# EAGLE board CT_schematic (EAGLE 7.6.0)

Size 100 x 80 mm. Coordinates in mm from the lower left corner, seen from the top.
Outline: 0,0 100,0 100,80 0,80 0,0
Copper layers (1*16): Top 0.035mm / dielectric 1.5mm / Bottom 0.035mm
Design rules "default": minimum track width 10mil, minimum drill 24mil, track to track 8mil, track to pad 8mil, pad to pad 8mil, via to via 8mil, smd to smd 8mil, copper to edge 40mil, drill to drill 8mil, minimum pad ring 10mil, minimum via ring 8mil, stop-mask expansion 4mil, vias tented up to drill 0mil, thermal gap 10mil

## Footprints (pad centres in the part's own frame; a part is rotated, then mirrored left to right if it is on the bottom)
C0603 = smd 0.8 x 0.8: 1 -0.762,0; 2 0.762,0
C0402 = smd 0.5 x 0.5: 1 -0.508,0; 2 0.508,0
C0805 = smd 1.2 x 1.3: 1 -1.016,0; 2 1.016,0
C1210 = smd 1.2 x 2.5: 1 -1.524,0; 2 1.524,0
R0603 = smd 0.8 x 0.8: 1 -0.762,0; 2 0.762,0
EXV-9H = smd 3.505 x 1.676: 1 -2.857,0; 2 2.857,0
L0603 = smd 0.8 x 0.8: 1 -0.762,0; 2 0.762,0
L1210 = smd 1.2 x 2.5: 1 -1.524,0; 2 1.524,0
WE-HCI_7030/7040/7050 = smd 2.5 x 3: 1 -2.45,0; 2 2.45,0
PJ-037B_PACKAGE = drill 3.7 square: 1 12,0 | drill 3.2 square: 2 6,0
TFBGA216 = smd 0.4 x 0.4: A1 -5.6,5.6; A2 -4.8,5.6; A3 -4,5.6; A4 -3.2,5.6; A5 -2.4,5.6; A6 -1.6,5.6; A7 -0.8,5.6; A8 0,5.6; A9 0.8,5.6; A10 1.6,5.6; A11 2.4,5.6; A12 3.2,5.6; A13 4,5.6; A14 4.8,5.6; A15 5.6,5.6; B1 -5.6,4.8; B2 -4.8,4.8; B3 -4,4.8; B4 -3.2,4.8; B5 -2.4,4.8; B6 -1.6,4.8; B7 -0.8,4.8; B8 0,4.8; B9 0.8,4.8; B10 1.6,4.8; B11 2.4,4.8; B12 3.2,4.8; B13 4,4.8; B14 4.8,4.8; B15 5.6,4.8; C1 -5.6,4; C2 -4.8,4; C3 -4,4; C4 -3.2,4; C5 -2.4,4; C6 -1.6,4; C7 -0.8,4; C8 0,4; C9 0.8,4; C10 1.6,4; C11 2.4,4; C12 3.2,4; C13 4,4; C14 4.8,4; C15 5.6,4; D1 -5.6,3.2; D2 -4.8,3.2; D3 -4,3.2; D4 -3.2,3.2; D5 -2.4,3.2; D6 -1.6,3.2; D7 -0.8,3.2; D8 0,3.2; D9 0.8,3.2; D10 1.6,3.2; D11 2.4,3.2; D12 3.2,3.2; D13 4,3.2; D14 4.8,3.2; D15 5.6,3.2; E1 -5.6,2.4; E2 -4.8,2.4; E3 -4,2.4; E4 -3.2,2.4; E5 -2.4,2.4; E6 -1.6,2.4; E7 -0.8,2.4; E8 0,2.4; E9 0.8,2.4; E10 1.6,2.4; E11 2.4,2.4; E12 3.2,2.4; E13 4,2.4; E14 4.8,2.4; E15 5.6,2.4; F1 -5.6,1.6; F2 -4.8,1.6; F3 -4,1.6; F4 -3.2,1.6; F5 -2.4,1.6; F6 -1.6,1.6; F7 -0.8,1.6; F8 0,1.6; F9 0.8,1.6; F10 1.6,1.6; F11 2.4,1.6; F12 3.2,1.6; F13 4,1.6; F14 4.8,1.6; F15 5.6,1.6; G1 -5.6,0.8; G2 -4.8,0.8; G3 -4,0.8; G4 -3.2,0.8; G5 -2.4,0.8; G6 -1.6,0.8; G10 1.6,0.8; G11 2.4,0.8; G12 3.2,0.8; G13 4,0.8; G14 4.8,0.8; G15 5.6,0.8; H1 -5.6,0; H2 -4.8,0; H3 -4,0; H4 -3.2,0; H5 -2.4,0; H6 -1.6,0; H10 1.6,0; H11 2.4,0; H12 3.2,0; H13 4,0; H14 4.8,0; H15 5.6,0; J1 -5.6,-0.8; J2 -4.8,-0.8; J3 -4,-0.8; J4 -3.2,-0.8; J5 -2.4,-0.8; J6 -1.6,-0.8; J10 1.6,-0.8; J11 2.4,-0.8; J12 3.2,-0.8; J13 4,-0.8; J14 4.8,-0.8; J15 5.6,-0.8; K1 -5.6,-1.6; K2 -4.8,-1.6; K3 -4,-1.6; K4 -3.2,-1.6; K5 -2.4,-1.6; K6 -1.6,-1.6; K7 -0.8,-1.6; K8 0,-1.6; K9 0.8,-1.6; K10 1.6,-1.6; K11 2.4,-1.6; K12 3.2,-1.6; K13 4,-1.6; K14 4.8,-1.6; K15 5.6,-1.6; L1 -5.6,-2.4; L2 -4.8,-2.4; L3 -4,-2.4; L4 -3.2,-2.4; L5 -2.4,-2.4; L6 -1.6,-2.4; L7 -0.8,-2.4; L8 0,-2.4; L9 0.8,-2.4; L10 1.6,-2.4; L11 2.4,-2.4; L12 3.2,-2.4; L13 4,-2.4; L14 4.8,-2.4; L15 5.6,-2.4; M1 -5.6,-3.2; M2 -4.8,-3.2; M3 -4,-3.2; M4 -3.2,-3.2; M5 -2.4,-3.2; M6 -1.6,-3.2; M7 -0.8,-3.2; M8 0,-3.2; M9 0.8,-3.2; M10 1.6,-3.2; M11 2.4,-3.2; M12 3.2,-3.2; M13 4,-3.2; M14 4.8,-3.2; M15 5.6,-3.2; N1 -5.6,-4; N2 -4.8,-4; N3 -4,-4; N4 -3.2,-4; N5 -2.4,-4; N6 -1.6,-4; N7 -0.8,-4; N8 0,-4; N9 0.8,-4; N10 1.6,-4; N11 2.4,-4; N12 3.2,-4; N13 4,-4; N14 4.8,-4; N15 5.6,-4; P1 -5.6,-4.8; P2 -4.8,-4.8; P3 -4,-4.8; P4 -3.2,-4.8; P5 -2.4,-4.8; P6 -1.6,-4.8; P7 -0.8,-4.8; P8 0,-4.8; P9 0.8,-4.8; P10 1.6,-4.8; P11 2.4,-4.8; P12 3.2,-4.8; P13 4,-4.8; P14 4.8,-4.8; P15 5.6,-4.8; R1 -5.6,-5.6; R2 -4.8,-5.6; R3 -4,-5.6; R4 -3.2,-5.6; R5 -2.4,-5.6; R6 -1.6,-5.6; R7 -0.8,-5.6; R8 0,-5.6; R9 0.8,-5.6; R10 1.6,-5.6; R11 2.4,-5.6; R12 3.2,-5.6; R13 4,-5.6; R14 4.8,-5.6; R15 5.6,-5.6
ARDUCAM = drill 1 pad 1.8 square: 1 0,0 | drill 1 pad 1.8: 2 0,2.54; 3 2.54,0; 4 2.54,2.54; 5 5.08,0; 6 5.08,2.54; 7 7.62,0; 8 7.62,2.54; 9 10.16,0; 10 10.16,2.54; 11 12.7,0; 12 12.7,2.54; 13 15.24,0; 14 15.24,2.54; 15 17.78,0; 16 17.78,2.54; 17 20.32,0; 18 20.32,2.54; 19 22.86,0; 20 22.86,2.54
SSOP-20 = smd 1.651 x 0.432: 1 -3.48,2.925; 2 -3.48,2.275; 3 -3.48,1.625; 4 -3.48,0.975; 5 -3.48,0.325; 6 -3.48,-0.325; 7 -3.48,-0.975; 8 -3.48,-1.625; 9 -3.48,-2.275; 10 -3.48,-2.925; 11 3.48,-2.925; 12 3.48,-2.275; 13 3.48,-1.625; 14 3.48,-0.975; 15 3.48,-0.325; 16 3.48,0.325; 17 3.48,0.975; 18 3.48,1.625; 19 3.48,2.275; 20 3.48,2.925
HTSS-105-01-G-D = drill 1 pad 1.8 square: 1 0,0 | drill 1 pad 1.8: 2 0,2.54; 3 2.54,0; 4 2.54,2.54; 5 5.08,0; 6 5.08,2.54; 7 7.62,0; 8 7.62,2.54; 9 10.16,0; 10 10.16,2.54
LBGA-64 = smd 0.559 x 0.559: A1 -3.5,3.5; A2 -2.5,3.5; A3 -1.5,3.5; A4 -0.5,3.5; A5 0.5,3.5; A6 1.5,3.5; A7 2.5,3.5; A8 3.5,3.5; B1 -3.5,2.5; B2 -2.5,2.5; B3 -1.5,2.5; B4 -0.5,2.5; B5 0.5,2.5; B6 1.5,2.5; B7 2.5,2.5; B8 3.5,2.5; C1 -3.5,1.5; C2 -2.5,1.5; C3 -1.5,1.5; C4 -0.5,1.5; C5 0.5,1.5; C6 1.5,1.5; C7 2.5,1.5; C8 3.5,1.5; D1 -3.5,0.5; D2 -2.5,0.5; D3 -1.5,0.5; D4 -0.5,0.5; D5 0.5,0.5; D6 1.5,0.5; D7 2.5,0.5; D8 3.5,0.5; E1 -3.5,-0.5; E2 -2.5,-0.5; E3 -1.5,-0.5; E4 -0.5,-0.5; E5 0.5,-0.5; E6 1.5,-0.5; E7 2.5,-0.5; E8 3.5,-0.5; F1 -3.5,-1.5; F2 -2.5,-1.5; F3 -1.5,-1.5; F4 -0.5,-1.5; F5 0.5,-1.5; F6 1.5,-1.5; F7 2.5,-1.5; F8 3.5,-1.5; G1 -3.5,-2.5; G2 -2.5,-2.5; G3 -1.5,-2.5; G4 -0.5,-2.5; G5 0.5,-2.5; G6 1.5,-2.5; G7 2.5,-2.5; G8 3.5,-2.5; H1 -3.5,-3.5; H2 -2.5,-3.5; H3 -1.5,-3.5; H4 -0.5,-3.5; H5 0.5,-3.5; H6 1.5,-3.5; H7 2.5,-3.5; H8 3.5,-3.5
TFBGA-153 = smd 0.3 x 0.3: A1 -3.25,3.25; A2 -2.75,3.25; A3 -2.25,3.25; A4 -1.75,3.25; A5 -1.25,3.25; A6 -0.75,3.25; A7 -0.25,3.25; A8 0.25,3.25; A9 0.75,3.25; A10 1.25,3.25; A11 1.75,3.25; A12 2.25,3.25; A13 2.75,3.25; A14 3.25,3.25; B1 -3.25,2.75; B2 -2.75,2.75; B3 -2.25,2.75; B4 -1.75,2.75; B5 -1.25,2.75; B6 -0.75,2.75; B7 -0.25,2.75; B8 0.25,2.75; B9 0.75,2.75; B10 1.25,2.75; B11 1.75,2.75; B12 2.25,2.75; B13 2.75,2.75; B14 3.25,2.75; C1 -3.25,2.25; C2 -2.75,2.25; C3 -2.25,2.25; C4 -1.75,2.25; C5 -1.25,2.25; C6 -0.75,2.25; C7 -0.25,2.25; C8 0.25,2.25; C9 0.75,2.25; C10 1.25,2.25; C11 1.75,2.25; C12 2.25,2.25; C13 2.75,2.25; C14 3.25,2.25; D1 -3.25,1.75; D2 -2.75,1.75; D3 -2.25,1.75; D4 -1.75,1.75; D12 2.25,1.75; D13 2.75,1.75; D14 3.25,1.75; E1 -3.25,1.25; E2 -2.75,1.25; E3 -2.25,1.25; E5 -1.25,1.25; E6 -0.75,1.25; E7 -0.25,1.25; E8 0.25,1.25; E9 0.75,1.25; E10 1.25,1.25; E12 2.25,1.25; E13 2.75,1.25; E14 3.25,1.25; F1 -3.25,0.75; F2 -2.75,0.75; F3 -2.25,0.75; F5 -1.25,0.75; F10 1.25,0.75; F12 2.25,0.75; F13 2.75,0.75; F14 3.25,0.75; G1 -3.25,0.25; G2 -2.75,0.25; G3 -2.25,0.25; G5 -1.25,0.25; G10 1.25,0.25; G12 2.25,0.25; G13 2.75,0.25; G14 3.25,0.25; H1 -3.25,-0.25; H2 -2.75,-0.25; H3 -2.25,-0.25; H5 -1.25,-0.25; H10 1.25,-0.25; H12 2.25,-0.25; H13 2.75,-0.25; H14 3.25,-0.25; J1 -3.25,-0.75; J2 -2.75,-0.75; J3 -2.25,-0.75; J5 -1.25,-0.75; J10 1.25,-0.75; J12 2.25,-0.75; J13 2.75,-0.75; J14 3.25,-0.75; K1 -3.25,-1.25; K2 -2.75,-1.25; K3 -2.25,-1.25; K5 -1.25,-1.25; K6 -0.75,-1.25; K7 -0.25,-1.25; K8 0.25,-1.25; K9 0.75,-1.25; K10 1.25,-1.25; K12 2.25,-1.25; K13 2.75,-1.25; K14 3.25,-1.25; L1 -3.25,-1.75; L2 -2.75,-1.75; L3 -2.25,-1.75; L12 2.25,-1.75; L13 2.75,-1.75; L14 3.25,-1.75; M1 -3.25,-2.25; M2 -2.75,-2.25; M3 -2.25,-2.25; M4 -1.75,-2.25; M5 -1.25,-2.25; M6 -0.75,-2.25; M7 -0.25,-2.25; M8 0.25,-2.25; M9 0.75,-2.25; M10 1.25,-2.25; M11 1.75,-2.25; M12 2.25,-2.25; M13 2.75,-2.25; M14 3.25,-2.25; N1 -3.25,-2.75; N2 -2.75,-2.75; N3 -2.25,-2.75; N4 -1.75,-2.75; N5 -1.25,-2.75; N6 -0.75,-2.75; N7 -0.25,-2.75; N8 0.25,-2.75; N9 0.75,-2.75; N10 1.25,-2.75; N11 1.75,-2.75; N12 2.25,-2.75; N13 2.75,-2.75; N14 3.25,-2.75; P1 -3.25,-3.25; P2 -2.75,-3.25; P3 -2.25,-3.25; P4 -1.75,-3.25; P5 -1.25,-3.25; P6 -0.75,-3.25; P7 -0.25,-3.25; P8 0.25,-3.25; P9 0.75,-3.25; P10 1.25,-3.25; P11 1.75,-3.25; P12 2.25,-3.25; P13 2.75,-3.25; P14 3.25,-3.25
ABS07-32.768KHZ-7-T = smd 1.1 x 2.4: 1 -2.5,0; 2 0,0
ASFL1 = smd 1.7 x 1.5: 1 -1.27,-1.1; 2 1.27,-1.1; 3 1.27,1.1; 4 -1.27,1.1
IDT74FCT38072 = smd 0.51 x 1: 1 0,0; 2 1.27,0; 3 2.54,0; 4 3.81,0; 5 3.81,4.95; 6 2.54,4.95; 7 1.27,4.95; 8 0,4.95
TSOT-23-5 = smd 1.3 x 0.62: 1 -1.31,0.95; 2 -1.31,0; 3 -1.31,-0.95; 4 1.31,-0.95; 5 1.31,0.95
HTSSOP14 = smd 1.676 x 0.356: 1 -2.8,1.95; 2 -2.8,1.3; 3 -2.8,0.65; 4 -2.8,0; 5 -2.8,-0.65; 6 -2.8,-1.3; 7 -2.8,-1.95; 8 2.8,-1.95; 9 2.8,-1.3; 10 2.8,-0.65; 11 2.8,0; 12 2.8,0.65; 13 2.8,1.3; 14 2.8,1.95 | smd 3 x 5: 15 0,0 | drill 0.4 pad 0.45: P$1 -0.75,1.5; P$2 0.75,1.5; P$3 -0.75,0; P$4 0.8,0; P$5 -0.75,-1.5; P$6 0.9,-1.5
QFN-38_UHF = smd 0.75 x 0.3: 1 -2.4,2.75; 2 -2.4,2.25; 3 -2.4,1.75; 4 -2.4,1.25; 6 -2.4,0.25; 7 -2.4,-0.25; 8 -2.4,-0.75; 9 -2.4,-1.25; 10 -2.4,-1.75; 11 -2.4,-2.25; 12 -2.4,-2.75; 20 2.4,-2.75; 21 2.4,-2.25; 22 2.4,-1.75; 23 2.4,-1.25; 24 2.4,-0.75; 25 2.4,-0.25; 26 2.4,0.25; 27 2.4,0.75; 28 2.4,1.25; 29 2.4,1.75; 30 2.4,2.25; 31 2.4,2.75 | smd 0.758 x 0.3: 5 -2.4,0.75 | smd 0.3 x 0.75: 13 -1.5,-3.4; 14 -1,-3.4; 15 -0.5,-3.4; 16 0,-3.4; 17 0.5,-3.4; 18 1,-3.4; 19 1.5,-3.4; 32 1.5,3.4; 33 1,3.4; 34 0.5,3.4; 35 0,3.4; 36 -0.5,3.4; 37 -1,3.4; 38 -1.5,3.4 | smd 3.2 x 5.2: 39 0,0
IRF8306MTRPBF = smd 0.9 x 1.85: 1 0,0; 2 0,-2.35; 6 6.4,0; 7 6.4,-2.35 | smd 0.75 x 0.75: 3 1.75,-1.175 | smd 1.45 x 0.87: 4 3.5,-0.565; 5 3.5,-1.785
SW_4-1437565-2 = smd 1.4 x 2.1: 1 -2.23,4.55; 2 -2.23,-4.55; 3 2.23,4.55; 4 2.23,-4.55
LGM67K-G1J2-24-Z = smd 0.8 x 1.4: A -2,0; C 0,0
NC7SZ125M5X = smd 1.3 x 0.7: 1 -1.3,0.95; 2 -1.3,0; 3 -1.3,-0.95; 4 1.3,-0.95; 5 1.3,0.95

## Placement (x,y rotation side)
C1  1e-06  [C0603]  -73.66,72.39 0 top  (outside the outline)
C2  1e-07  [C0603]  -77.47,72.39 0 top  (outside the outline)
C3  1e-07  [C0603]  -81.28,72.39 0 top  (outside the outline)
C4  1e-07  [C0603]  -85.09,72.39 0 top  (outside the outline)
C5  1e-07  [C0603]  -15.24,77.47 0 top  (outside the outline)
C6  1e-07  [C0603]  -19.05,77.47 0 top  (outside the outline)
C7  1e-07  [C0603]  -22.86,77.47 0 top  (outside the outline)
C8  1e-07  [C0603]  -26.67,77.47 0 top  (outside the outline)
C9  1e-07  [C0603]  -30.48,77.47 0 top  (outside the outline)
C10  1e-07  [C0603]  -34.29,77.47 0 top  (outside the outline)
C11  1e-07  [C0603]  -38.1,77.47 0 top  (outside the outline)
C12  1e-07  [C0603]  -41.91,77.47 0 top  (outside the outline)
C13  1e-07  [C0603]  -45.72,77.47 0 top  (outside the outline)
C14  1e-07  [C0603]  -49.53,77.47 0 top  (outside the outline)
C15  1e-07  [C0603]  -53.34,77.47 0 top  (outside the outline)
C16  1e-07  [C0603]  -57.15,77.47 0 top  (outside the outline)
C17  1e-07  [C0603]  -60.96,77.47 0 top  (outside the outline)
C18  1e-07  [C0603]  -64.77,77.47 0 top  (outside the outline)
C19  1e-07  [C0603]  -68.58,77.47 0 top  (outside the outline)
C20  1e-07  [C0603]  -72.39,77.47 0 top  (outside the outline)
C21  1e-07  [C0603]  -76.2,77.47 0 top  (outside the outline)
C22  4.7e-06  [C0603]  -54.61,72.39 0 top  (outside the outline)
C23  1e-08  [C0603]  -80.01,77.47 0 top  (outside the outline)
C24  1e-06  [C0603]  -83.82,77.47 0 top  (outside the outline)
C25  1e-07  [C0603]  -15.24,82.55 0 top  (outside the outline)
C26  1e-07  [C0603]  -19.05,82.55 0 top  (outside the outline)
C27  1e-07  [C0603]  -22.86,82.55 0 top  (outside the outline)
C28  1e-11  [C0402]  -73.66,82.55 0 top  (outside the outline)
C29  1e-11  [C0402]  -77.47,82.55 0 top  (outside the outline)
C30  1e-06  [C0603]  -26.67,82.55 0 top  (outside the outline)
C31  1e-06  [C0603]  -30.48,82.55 0 top  (outside the outline)
C32  1e-06  [C0603]  -34.29,82.55 0 top  (outside the outline)
C33  1e-06  [C0603]  -38.1,82.55 0 top  (outside the outline)
C34  4.7e-06  [C0805]  -85.09,49.53 0 top  (outside the outline)
C35  1e-08  [C0402]  -81.28,82.55 0 top  (outside the outline)
C36  1e-08  [C0402]  -85.09,82.55 0 top  (outside the outline)
C37  1e-07  [C0402]  -15.24,87.63 0 top  (outside the outline)
C38  2.2e-06  [C0603]  -58.42,72.39 0 top  (outside the outline)
C39  2.2e-06  [C0603]  -62.23,72.39 0 top  (outside the outline)
C40  1e-07  [C0402]  -19.05,87.63 0 top  (outside the outline)
C41  1e-07  [C0402]  -22.86,87.63 0 top  (outside the outline)
C42  2.2e-06  [C0603]  -66.04,72.39 0 top  (outside the outline)
C43  1e-08  [C0402]  -26.67,87.63 0 top  (outside the outline)
C44  1e-08  [C0402]  -30.48,87.63 0 top  (outside the outline)
C45  1e-05  [C0805]  -15.24,57.15 0 top  (outside the outline)
C46  1e-05  [C0805]  -20.32,57.15 0 top  (outside the outline)
C47  1e-06  [C0603]  -41.91,82.55 0 top  (outside the outline)
C48  3.3e-09  [C0402]  -69.85,82.55 0 top  (outside the outline)
C49  1e-07  [C0402]  -34.29,87.63 0 top  (outside the outline)
C50  2.2e-05  [C1210]  -29.21,50.8 0 top  (outside the outline)
C51  2.2e-05  [C1210]  -35.56,50.8 0 top  (outside the outline)
C52  1e-05  [C0805]  -25.4,57.15 0 top  (outside the outline)
C53  1e-05  [C0805]  -30.48,57.15 0 top  (outside the outline)
C54  1e-05  [C0805]  -35.56,57.15 0 top  (outside the outline)
C55  1e-05  [C0805]  -40.64,57.15 0 top  (outside the outline)
C56  1e-07  [C0402]  -38.1,87.63 0 top  (outside the outline)
C57  2.2e-06  [C0603]  -69.85,72.39 0 top  (outside the outline)
C58  2.45e-08  [R0603]  -52.07,62.23 0 top  (outside the outline)
C59  2.8258362168397e-09  [R0603]  -63.5,57.15 0 top  (outside the outline)
C60  7.105e-09  [R0603]  -31.75,62.23 0 top  (outside the outline)
C61  0.0001  [EXV-9H]  -72.39,34.29 0 top  (outside the outline)
C62  0.0001  [EXV-9H]  -17.78,43.18 0 top  (outside the outline)
C63  1e-08  [C0402]  -41.91,87.63 0 top  (outside the outline)
C64  1e-08  [C0402]  -45.72,87.63 0 top  (outside the outline)
C65  1e-08  [C0402]  -49.53,87.63 0 top  (outside the outline)
C66  1e-08  [C0402]  -53.34,87.63 0 top  (outside the outline)
F1  240.0  [L0603]  -45.72,82.55 0 top  (outside the outline)
I1  1.5e-05  [L1210]  -41.91,50.8 0 top  (outside the outline)
I2  1.5e-05  [L1210]  -48.26,50.8 0 top  (outside the outline)
I3  3.3e-06  [WE-HCI_7030/7040/7050]  -80.01,6.35 0 top  (outside the outline)
I4  1.5e-05  [L1210]  -54.61,50.8 0 top  (outside the outline)
J1  PJ-037B  [PJ-037B_PACKAGE]  -74.93,7.62 0 top  (outside the outline)
R2  1000.0  [R0603]  -49.53,82.55 0 top  (outside the outline)
R7  4700.0  [R0603]  -53.34,82.55 0 top  (outside the outline)
R8  4700.0  [R0603]  -57.15,82.55 0 top  (outside the outline)
R9  4700.0  [R0603]  -60.96,82.55 0 top  (outside the outline)
R10  4700.0  [R0603]  -64.77,82.55 0 top  (outside the outline)
R11  10000.0  [R0603]  -57.15,62.23 0 top  (outside the outline)
R12  10000.0  [R0603]  -62.23,62.23 0 top  (outside the outline)
R13  10000.0  [R0603]  -67.31,62.23 0 top  (outside the outline)
R14  100000.0  [R0603]  -36.83,62.23 0 top  (outside the outline)
R15  100000.0  [R0603]  -41.91,62.23 0 top  (outside the outline)
R16  100000.0  [R0603]  -46.99,62.23 0 top  (outside the outline)
R17  10000.0  [R0603]  -72.39,62.23 0 top  (outside the outline)
R18  10000.0  [R0603]  -77.47,62.23 0 top  (outside the outline)
R19  10000.0  [R0603]  -82.55,62.23 0 top  (outside the outline)
R20  10000.0  [R0603]  -15.24,67.31 0 top  (outside the outline)
R21  10000.0  [R0603]  -20.32,67.31 0 top  (outside the outline)
R22  34000.0  [R0603]  -25.4,67.31 0 top  (outside the outline)
R23  34000.0  [R0603]  -30.48,67.31 0 top  (outside the outline)
R24  34000.0  [R0603]  -35.56,67.31 0 top  (outside the outline)
R25  34000.0  [R0603]  -40.64,67.31 0 top  (outside the outline)
R26  34000.0  [R0603]  -45.72,67.31 0 top  (outside the outline)
R27  34000.0  [R0603]  -50.8,67.31 0 top  (outside the outline)
R28  34000.0  [R0603]  -55.88,67.31 0 top  (outside the outline)
R29  34000.0  [R0603]  -60.96,67.31 0 top  (outside the outline)
R30  34000.0  [R0603]  -66.04,67.31 0 top  (outside the outline)
R31  34000.0  [R0603]  -71.12,67.31 0 top  (outside the outline)
R32  1000000.0  [R0603]  -83.82,57.15 0 top  (outside the outline)
R33  1000000.0  [R0603]  -16.51,62.23 0 top  (outside the outline)
R34  71007.101651032  [R0603]  -71.12,57.15 0 top  (outside the outline)
R35  22000.0  [R0603]  -76.2,67.31 0 top  (outside the outline)
R36  1000000.0  [R0603]  -21.59,62.23 0 top  (outside the outline)
R37  1000000.0  [R0603]  -26.67,62.23 0 top  (outside the outline)
R38  10000.0  [R0603]  -81.28,67.31 0 top  (outside the outline)
R39  75000.0  [R0603]  -15.24,72.39 0 top  (outside the outline)
R40  10000.0  [R0603]  -20.32,72.39 0 top  (outside the outline)
R41  10000.0  [R0603]  -25.4,72.39 0 top  (outside the outline)
R42  95300.0  [R0603]  -30.48,72.39 0 top  (outside the outline)
R43  95300.0  [R0603]  -35.56,72.39 0 top  (outside the outline)
R44  10000.0  [R0603]  -40.64,72.39 0 top  (outside the outline)
R45  10000.0  [R0603]  -45.72,72.39 0 top  (outside the outline)
R46  10000.0  [R0603]  -50.8,72.39 0 top  (outside the outline)
R47  36527.272727273  [R0603]  -78.74,57.15 0 top  (outside the outline)
U1  STM32F746NEH6  [TFBGA216]  -39.37,8.89 0 top  (outside the outline)
U2  arducam_ov2640  [ARDUCAM]  -71.12,40.64 0 top  (outside the outline)
U3  MAX3218EAP+T  [SSOP-20]  -17.78,34.29 0 top  (outside the outline)
U4  HTSS-105-01-G-D  [HTSS-105-01-G-D]  -46.99,21.59 0 top  (outside the outline)
U5  mt28ew512aba1HPC-0AAT  [LBGA-64]  -52.07,7.62 0 top  (outside the outline)
U6  mtfc4gmcdm  [TFBGA-153]  -20.32,8.89 0 top  (outside the outline)
U7  ABS07-32.768KHZ-7-T  [ABS07-32.768KHZ-7-T]  -39.37,43.18 0 top  (outside the outline)
U8  ASFL1-25MHZ-NCS  [ASFL1]  -36.83,34.29 0 top  (outside the outline)
U9  idt74fct38072  [IDT74FCT38072]  -66.04,31.75 0 top  (outside the outline)
U10  ltc3406es5  [TSOT-23-5]  -45.72,55.88 0 top  (outside the outline)
U11  tps54225PWP  [HTSSOP14]  -78.74,43.18 0 top  (outside the outline)
U12  ltc3406es5  [TSOT-23-5]  -52.07,55.88 0 top  (outside the outline)
U13  LTC2928CUHF#PBF  [QFN-38_UHF]  -44.45,34.29 0 top  (outside the outline)
U14  IRF8306MTRPbF  [IRF8306MTRPBF]  -63.5,24.13 0 top  (outside the outline)
U15  IRF8306MTRPbF  [IRF8306MTRPBF]  -78.74,24.13 0 top  (outside the outline)
U16  4-1437565-2  [SW_4-1437565-2]  -27.94,24.13 0 top  (outside the outline)
U17  Q65110A2395  [LGM67K-G1J2-24-Z]  -17.78,50.8 0 top  (outside the outline)
U18  nc7sz125m5x  [NC7SZ125M5X]  -59.69,49.53 0 top  (outside the outline)
U19  nc7sz125m5x  [NC7SZ125M5X]  -66.04,49.53 0 top  (outside the outline)
U20  nc7sz125m5x  [NC7SZ125M5X]  -72.39,49.53 0 top  (outside the outline)
U21  nc7sz125m5x  [NC7SZ125M5X]  -78.74,49.53 0 top  (outside the outline)

## Library data of the parts
C1-C66 F1 I1-I4 J1 R2 R7-R47 U1-U21 = circuit_tree

## Nets
CLK_CRYSTAL_U1_E1: C28.1 U1.E1 U7.1
CLK_CRYSTAL_U1_F1: C29.1 U1.F1 U7.2
CLK_U1_G1: U1.G1 U9.6
CLK_U2_8: U2.8 U9.7
CLK_U9_3: U8.3 U9.3
GND: C1.2 C2.2 C3.2 C4.2 C5.2 C6.2 C7.2 C8.2 C9.2 C10.2 C11.2 C12.2 C13.2 C14.2 C15.2 C16.2 C17.2 C18.2 C19.2 C20.2 C21.2 C22.2 C23.2 C24.2 C25.2 C26.2 C27.2 C28.2 C29.2 C30.2 C31.2 C32.2 C33.2 C35.2 C36.2 C37.2 C38.2 C39.2 C40.2 C41.2 C42.2 C43.2 C44.2 C45.2 C46.1 C46.2 C47.2 C48.2 C50.2 C51.2 C52.2 C53.2 C54.2 C55.1 C55.2 C56.2 C57.2 C58.2 C59.2 C60.2 C61.2 C62.2 C63.2 C64.2 C65.2 C66.2 J1.2 R2.2 R11.2 R32.2 R35.2 R36.2 R39.2 R42.2 R43.2 R44.2 R45.2 R46.2 U1.F2 U1.F6 U1.F7 U1.F8 U1.F9 U1.F10 U1.G6 U1.G10 U1.H6 U1.H10 U1.J6 U1.J10 U1.K6 U1.K7 U1.K8 U1.K9 U1.K10 U1.L6 U1.M1 U1.N1 U2.2 U2.20 U3.5 U3.17 U3.20 U4.9 U5.E8 U5.H2 U5.H7 U6.C4 U6.E7 U6.G5 U6.H10 U6.K8 U6.N2 U6.N5 U6.P4 U6.P6 U8.2 U9.4 U9.5 U9.8 U10.2 U11.5 U11.8 U11.9 U11.15 U12.2 U13.8 U13.9 U13.10 U13.12 U13.13 U13.24 U13.25 U13.30 U13.32 U13.39 U17.C U18.1 U18.3 U19.1 U19.3 U20.1 U20.3 U21.1 U21.3
NET_U1_E5: R12.1 U1.E5
NET_U1_E6: R11.1 U1.E6
NET_U1_E11: C27.1 U1.E11
NET_U1_J1: R9.1 U1.J1 U20.4
NET_U1_L5: R13.1 U1.L5
NET_U1_R1: C23.1 C24.1 F1.1 U1.P1 U1.R1
NET_U1_R14: U17.A
NET_U1_R15: U16.3 U16.4
NET_U2_19: R10.1 U2.19 U21.4
NET_U3_1: I1.1 U3.1
NET_U3_2: R14.1 U3.2
NET_U3_3: R15.1 U3.3
NET_U3_4: R16.1 U3.4
NET_U3_15: C33.1 U3.15
NET_U3_16: C34.2 U3.16
NET_U3_18: C34.1 U3.18
NET_U3_19: C32.1 U3.19
NET_U4_3: U3.12 U4.3
NET_U4_4: U3.11 U4.4
NET_U4_5: U3.14 U4.5
NET_U4_6: U3.13 U4.6
NET_U5_B4: R20.1 U5.B4
NET_U5_B5: R7.1 U5.B5 U18.4
NET_U6_C2: C39.1 C40.1 U6.C2
NET_U6_K5: R8.1 U6.K5 U19.4
NET_U10_1: U10.1
NET_U10_3: I2.1 U10.3
NET_U10_5: R32.1 R33.1 U10.5
NET_U10_ATNET_3: I2.2 R33.2
NET_U11_2: R34.2 R35.1 U11.2
NET_U11_3: C47.1 U11.3
NET_U11_4: C48.1 U11.4
NET_U11_10: C49.1 I3.1 U11.10 U11.11
NET_U11_12: C49.2 U11.12
NET_U12_1: U12.1
NET_U12_3: I4.1 U12.3
NET_U12_5: R36.1 R37.1 U12.5
NET_U12_ATNET_3: I4.2 R37.2
NET_U13_3: R45.1 U13.3
NET_U13_6: R42.1 U13.6
NET_U13_7: R43.1 U13.7
NET_U13_16: R44.1 R47.1 U13.16
NET_U13_18: R41.1 U13.18
NET_U13_19: R40.1 U13.19 U13.20
NET_U13_21: R38.1 R39.1 U13.21 U18.2 U19.2 U20.2 U21.2
NET_U13_26: C59.1 U13.26
NET_U13_27: C58.1 U13.27
NET_U13_28: C60.1 U13.28
NET_U13_38: R46.1 U13.38
NET_U14_3: U13.2 U14.3
NET_U15_3: U13.37 U15.3
NET_U16_1: R2.1 U16.1 U16.2
PROC_DCMI_D0: U1.E15 U2.18
PROC_DCMI_D1: U1.D15 U2.17
PROC_DCMI_D2: U1.C8 U2.16
PROC_DCMI_D3: U1.A5 U2.15
PROC_DCMI_D4: U1.E13 U2.14
PROC_DCMI_D5: U1.B6 U2.13
PROC_DCMI_D6: U1.D6 U2.12
PROC_DCMI_D7: U1.D4 U2.11
PROC_DCMI_D8: U1.D14 U2.10
PROC_DCMI_D9: U1.C14 U2.9
PROC_DCMI_HSYNC: U1.N4 U2.6
PROC_DCMI_PIXCLK: U1.P3 U2.7
PROC_DCMI_VSYNC: U1.B5 U2.5
PROC_FMC_A0: U1.D2 U5.E2
PROC_FMC_A1: U1.E2 U5.D2
PROC_FMC_A2: U1.G2 U5.C2
PROC_FMC_A3: U1.H2 U5.A2
PROC_FMC_A4: U1.J2 U5.B2
PROC_FMC_A5: U1.K3 U5.D3
PROC_FMC_A6: U1.M6 U5.C3
PROC_FMC_A7: U1.N6 U5.A3
PROC_FMC_A8: U1.P6 U5.B6
PROC_FMC_A9: U1.M8 U5.A6
PROC_FMC_A10: U1.N7 U5.C6
PROC_FMC_A11: U1.M7 U5.D6
PROC_FMC_A12: U1.M13 U5.B7
PROC_FMC_A13: U1.M12 U5.A7
PROC_FMC_A14: U1.N12 U5.C7
PROC_FMC_A15: U1.N11 U5.D7
PROC_FMC_A16: U1.N10 U5.E7
PROC_FMC_A17: U1.M10 U5.B3
PROC_FMC_A18: U1.M11 U5.C4
PROC_FMC_A19: U1.A2 U5.D5
PROC_FMC_A20: U1.A1 U5.D4
PROC_FMC_A21: U1.B1 U5.C5
PROC_FMC_A22: U1.B2 U5.B8
PROC_FMC_A23: U1.A3 U5.C8
PROC_FMC_A24: U1.B3 U5.F8
PROC_FMC_D0: U1.L12 U5.E3
PROC_FMC_D1: U1.K13 U5.H3
PROC_FMC_D2: U1.B12 U5.E4
PROC_FMC_D3: U1.C12 U5.H4
PROC_FMC_D4: U1.R8 U5.H5
PROC_FMC_D5: U1.N9 U5.E5
PROC_FMC_D6: U1.P9 U5.H6
PROC_FMC_D7: U1.R9 U5.E6
PROC_FMC_D8: U1.P10 U5.F3
PROC_FMC_D9: U1.R10 U5.G3
PROC_FMC_D10: U1.R12 U5.F4
PROC_FMC_D11: U1.P11 U5.G4
PROC_FMC_D12: U1.R11 U5.F5
PROC_FMC_D13: U1.L15 U5.G6
PROC_FMC_D14: U1.L14 U5.F6
PROC_FMC_D15: U1.K15 U5.G7
PROC_FMC_NBL0: R21.1 U1.A6 U5.F7
PROC_FMC_NE2: R17.1 U1.D9 U5.F2
PROC_FMC_NOE: R18.1 U1.D11 U5.G2
PROC_FMC_NWAIT: U1.B11 U5.A4
PROC_FMC_NWE: R19.1 U1.C10 U5.A5
PROC_SDMMC1_CK: R31.1 U1.A12 U6.M6
PROC_SDMMC1_CMD: R30.1 U1.D12 U6.M5
PROC_SDMMC1_D0: R22.1 U1.G14 U6.A3
PROC_SDMMC1_D1: R23.1 U1.F14 U6.A4
PROC_SDMMC1_D2: R24.1 U1.B14 U6.A5
PROC_SDMMC1_D3: R25.1 U1.B13 U6.B2
PROC_SDMMC1_D4: R26.1 U1.A7 U6.B3
PROC_SDMMC1_D5: R27.1 U1.B4 U6.B4
PROC_SDMMC1_D6: R28.1 U1.H15 U6.B5
PROC_SDMMC1_D7: R29.1 U1.G15 U6.B6
PROC_UART7_CTS: U3.8
PROC_UART7_RTS: U3.10
PROC_UART7_RX: U3.9
PROC_UART7_TX: U3.7
VCC_5V2: C56.1 C57.1 C61.1 C62.1 J1.1 R38.2 R40.2 R41.2 R47.2 U13.11 U13.22 U14.1 U14.2 U14.6 U14.7 U15.1 U15.2 U15.6 U15.7
VCC_S1_5V2: C45.1 C52.1 C53.1 U10.4 U11.7 U11.13 U11.14 U14.4 U14.5
VCC_S2_5V2: C54.1 U12.4 U15.4 U15.5
VCC_TIER1_1V2: C26.1 C46.2 I2.2 R33.2 U1.L11
VCC_TIER1_3V3: C1.1 C2.1 C3.1 C4.1 C5.1 C6.1 C7.1 C8.1 C9.1 C10.1 C11.1 C12.1 C13.1 C14.1 C15.1 C16.1 C17.1 C18.1 C19.1 C20.1 C21.1 C22.1 C25.1 C30.1 C31.1 C35.1 C36.1 C37.1 C38.1 C41.1 C42.1 C43.1 C44.1 C50.1 C51.1 C63.1 C64.1 C65.1 C66.1 F1.2 I1.2 I3.2 R7.2 R8.2 R9.2 R10.2 R12.2 R13.2 R14.2 R15.2 R16.2 R17.2 R18.2 R19.2 R20.2 R21.2 R22.2 R23.2 R24.2 R25.2 R26.2 R27.2 R28.2 R29.2 R30.2 R31.2 R34.1 U1.C1 U1.E7 U1.E8 U1.E9 U1.E10 U1.F4 U1.F5 U1.F11 U1.G5 U1.G11 U1.H5 U1.H11 U1.J5 U1.J11 U1.K5 U1.K11 U1.L7 U1.L8 U1.L9 U1.L10 U2.1 U3.6 U5.D8 U5.F1 U5.G5 U6.C6 U6.E6 U6.F5 U6.J10 U6.K9 U6.M4 U6.N4 U6.P3 U6.P5 U8.4 U9.1 U9.2 U11.1 U18.5 U19.5 U20.5 U21.5
VCC_TIER2_1V2: C55.2 I4.2 R37.2

## Tracks (layer width: path | path; a pad name or v marks a point on that pad's centre or on a via)
CLK_CRYSTAL_U1_E1  (2 unrouted)
CLK_CRYSTAL_U1_F1  (2 unrouted)
CLK_U1_G1  (1 unrouted)
CLK_U2_8  (1 unrouted)
CLK_U9_3  (1 unrouted)
GND  (144 unrouted)
NET_U1_E5  (1 unrouted)
NET_U1_E6  (1 unrouted)
NET_U1_E11  (1 unrouted)
NET_U1_J1  (2 unrouted)
NET_U1_L5  (1 unrouted)
NET_U1_R1  (4 unrouted)
NET_U1_R15  (1 unrouted)
NET_U2_19  (2 unrouted)
NET_U3_1  (1 unrouted)
NET_U3_2  (1 unrouted)
NET_U3_3  (1 unrouted)
NET_U3_4  (1 unrouted)
NET_U3_15  (1 unrouted)
NET_U3_16  (1 unrouted)
NET_U3_18  (1 unrouted)
NET_U3_19  (1 unrouted)
NET_U4_3  (1 unrouted)
NET_U4_4  (1 unrouted)
NET_U4_5  (1 unrouted)
NET_U4_6  (1 unrouted)
NET_U5_B4  (1 unrouted)
NET_U5_B5  (2 unrouted)
NET_U6_C2  (2 unrouted)
NET_U6_K5  (2 unrouted)
NET_U10_3  (1 unrouted)
NET_U10_5  (2 unrouted)
NET_U10_ATNET_3  (1 unrouted)
NET_U11_2  (2 unrouted)
NET_U11_3  (1 unrouted)
NET_U11_4  (1 unrouted)
NET_U11_10  (3 unrouted)
NET_U11_12  (1 unrouted)
NET_U12_3  (1 unrouted)
NET_U12_5  (2 unrouted)
NET_U12_ATNET_3  (1 unrouted)
NET_U13_3  (1 unrouted)
NET_U13_6  (1 unrouted)
NET_U13_7  (1 unrouted)
NET_U13_16  (2 unrouted)
NET_U13_18  (1 unrouted)
NET_U13_19  (2 unrouted)
NET_U13_21  (6 unrouted)
NET_U13_26  (1 unrouted)
NET_U13_27  (1 unrouted)
NET_U13_28  (1 unrouted)
NET_U13_38  (1 unrouted)
NET_U14_3  (1 unrouted)
NET_U15_3  (1 unrouted)
NET_U16_1  (2 unrouted)
PROC_DCMI_D0  (1 unrouted)
PROC_DCMI_D1  (1 unrouted)
PROC_DCMI_D2  (1 unrouted)
PROC_DCMI_D3  (1 unrouted)
PROC_DCMI_D4  (1 unrouted)
PROC_DCMI_D5  (1 unrouted)
PROC_DCMI_D6  (1 unrouted)
PROC_DCMI_D7  (1 unrouted)
PROC_DCMI_D8  (1 unrouted)
PROC_DCMI_D9  (1 unrouted)
PROC_DCMI_HSYNC  (1 unrouted)
PROC_DCMI_PIXCLK  (1 unrouted)
PROC_DCMI_VSYNC  (1 unrouted)
PROC_FMC_A0  (1 unrouted)
PROC_FMC_A1  (1 unrouted)
PROC_FMC_A2  (1 unrouted)
PROC_FMC_A3  (1 unrouted)
PROC_FMC_A4  (1 unrouted)
PROC_FMC_A5  (1 unrouted)
PROC_FMC_A6  (1 unrouted)
PROC_FMC_A7  (1 unrouted)
PROC_FMC_A8  (1 unrouted)
PROC_FMC_A9  (1 unrouted)
PROC_FMC_A10  (1 unrouted)
PROC_FMC_A11  (1 unrouted)
PROC_FMC_A12  (1 unrouted)
PROC_FMC_A13  (1 unrouted)
PROC_FMC_A14  (1 unrouted)
PROC_FMC_A15  (1 unrouted)
PROC_FMC_A16  (1 unrouted)
PROC_FMC_A17  (1 unrouted)
PROC_FMC_A18  (1 unrouted)
PROC_FMC_A19  (1 unrouted)
PROC_FMC_A20  (1 unrouted)
PROC_FMC_A21  (1 unrouted)
PROC_FMC_A22  (1 unrouted)
PROC_FMC_A23  (1 unrouted)
PROC_FMC_A24  (1 unrouted)
PROC_FMC_D0  (1 unrouted)
PROC_FMC_D1  (1 unrouted)
PROC_FMC_D2  (1 unrouted)
PROC_FMC_D3  (1 unrouted)
PROC_FMC_D4  (1 unrouted)
PROC_FMC_D5  (1 unrouted)
PROC_FMC_D6  (1 unrouted)
PROC_FMC_D7  (1 unrouted)
PROC_FMC_D8  (1 unrouted)
PROC_FMC_D9  (1 unrouted)
PROC_FMC_D10  (1 unrouted)
PROC_FMC_D11  (1 unrouted)
PROC_FMC_D12  (1 unrouted)
PROC_FMC_D13  (1 unrouted)
PROC_FMC_D14  (1 unrouted)
PROC_FMC_D15  (1 unrouted)
PROC_FMC_NBL0  (2 unrouted)
PROC_FMC_NE2  (2 unrouted)
PROC_FMC_NOE  (2 unrouted)
PROC_FMC_NWAIT  (1 unrouted)
PROC_FMC_NWE  (2 unrouted)
PROC_SDMMC1_CK  (2 unrouted)
PROC_SDMMC1_CMD  (2 unrouted)
PROC_SDMMC1_D0  (2 unrouted)
PROC_SDMMC1_D1  (2 unrouted)
PROC_SDMMC1_D2  (2 unrouted)
PROC_SDMMC1_D3  (2 unrouted)
PROC_SDMMC1_D4  (2 unrouted)
PROC_SDMMC1_D5  (2 unrouted)
PROC_SDMMC1_D6  (2 unrouted)
PROC_SDMMC1_D7  (2 unrouted)
VCC_5V2  (18 unrouted)
VCC_S1_5V2  (8 unrouted)
VCC_S2_5V2  (3 unrouted)
VCC_TIER1_1V2  (4 unrouted)
VCC_TIER1_3V3  (108 unrouted)
VCC_TIER2_1V2  (2 unrouted)